# Altium PCB final.PcbDoc
Units mm, origin at the board's own origin, x right, y up, seen from the top; angles counter-clockwise.
Board outline 152.4 x 101.6 mm, 2 copper layers (Top Layer, Bottom Layer); 5 components, 12 nets, 30 pads, 0 vias.
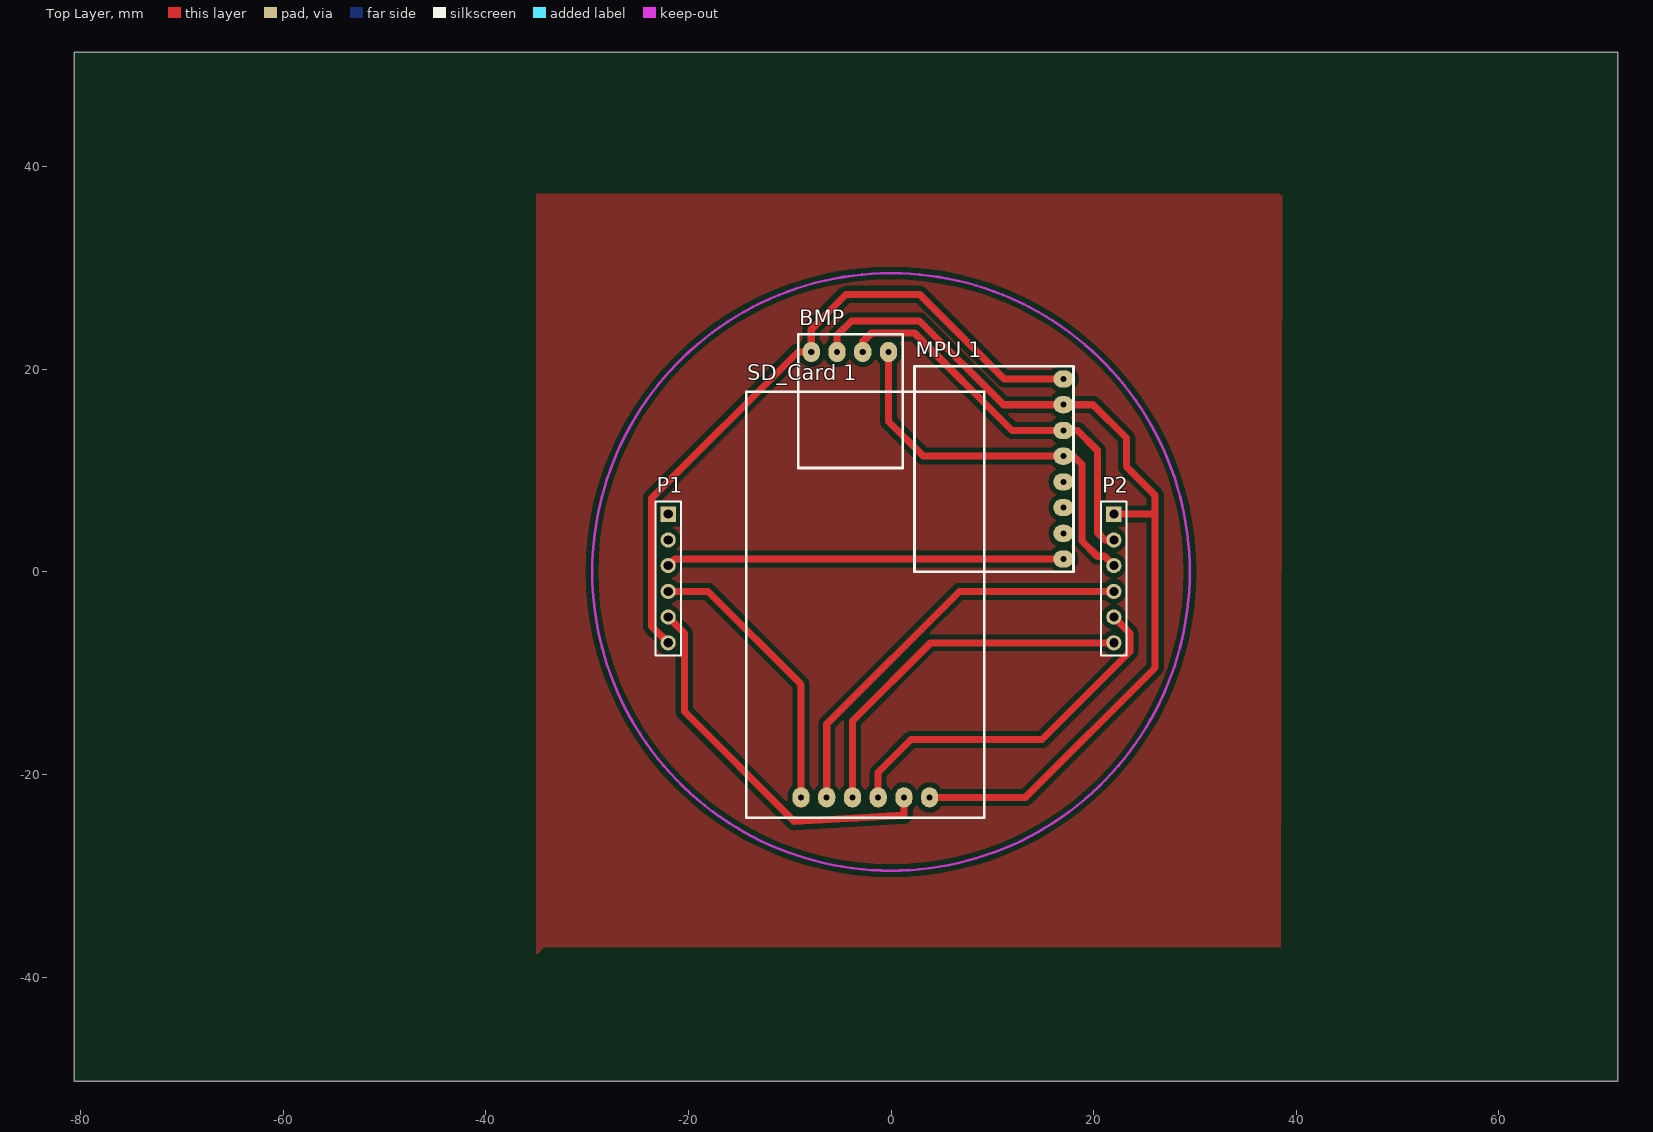
[diagram p0: Top Layer view]
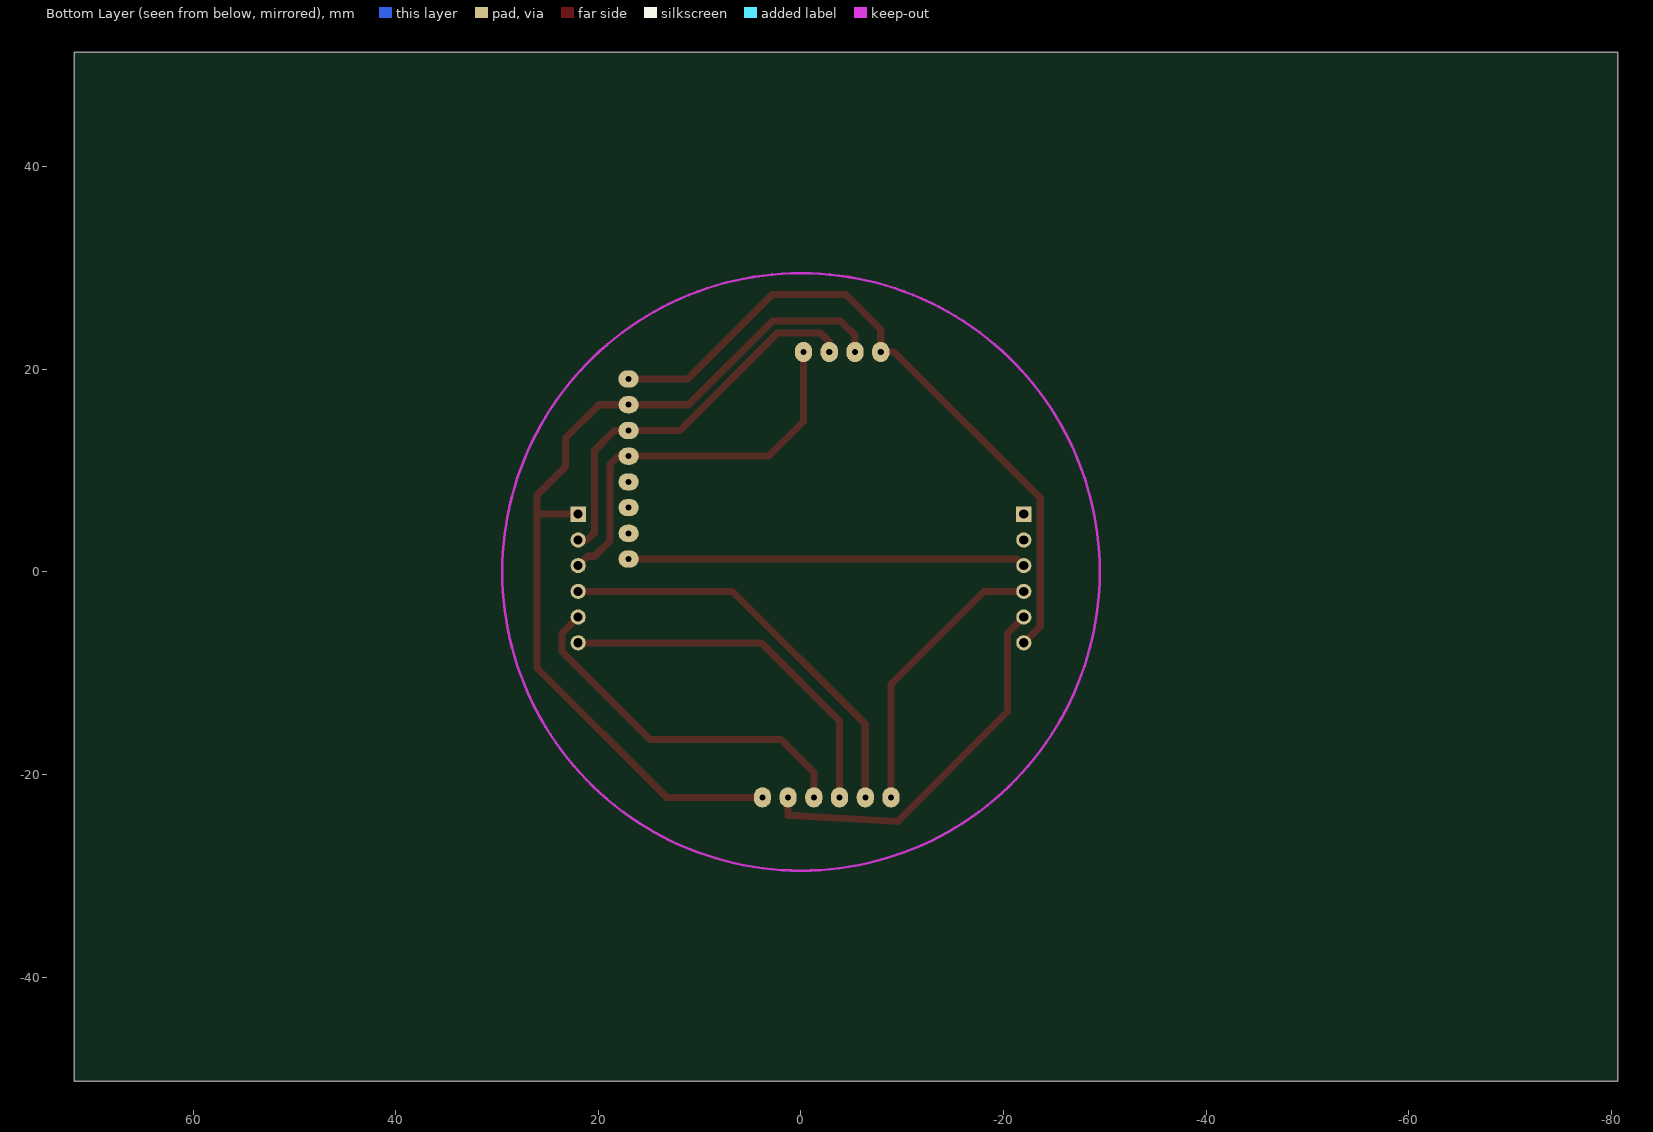
[diagram p1: Bottom Layer view, seen from below]

## Layer stack, top to bottom
Top Solder: solder mask 0.0102, Solder Resist, Dk 3.5
Top Layer: signal copper 0.0356
Dielectric 1: dielectric 0.32, FR-4, Dk 4.8
Bottom Layer: signal copper 0.0356
Bottom Solder: solder mask 0.0102, Solder Resist, Dk 3.5

## Board outline
-80.645,-50.292 71.755,-50.292 71.755,51.308 -80.645,51.308

## Design rules (kind name [scope] priority, off if disabled: settings)
Clearance [All] p1: gap=0.5 ignorepadtopadclearanceinfootprint=FALSE
PolygonConnect [All] p1: connectstyle=Relief reliefconductorwidth=0.254 reliefentries=4 polygonreliefangle="90 Angle" airgapwidth=0.254
RoutingLayers [All] p1: top layer_v5=TRUE bottom layer_v5=FALSE
RoutingVias [All] p1: holewidth=0.711 width=1.27 viastyle="Through Hole" minholewidth=0.711 minwidth=1.27 maxholewidth=0.711 maxwidth=1.27
SolderMaskExpansion [All] p1: expansion=0.102
Width [All] p1: maxlimit=1 minlimit=0.5 preferedwidth=0.7
29 further rules are at their usual default settings.

## Components (designator, comment, footprint, x,y, rotation, side; value= is the part's Value field where it differs from the comment)
BMP "BMP" BMP -4.064,16.859 r180 top
"MPU 1" "MPU" MPU 2.318,20.32 r90 top
P1 "Header 6" HDR1X6 -22,5.7 r270 top
P2 "Header 6" HDR1X6 22,5.7 r270 top
"SD_Card 1" "SD_Card" SD_Card -2.54,-24.257 r0 top

## Footprints (in the part's own frame and the unit in brackets; to place one, negate y for a bottom-side part, rotate by r counter-clockwise, add the part's x,y. Pads: shape width x height; smd on the part's side, far side on the other; paste and mask are expansions set on the pad)
BMP [mm]
  oval 1.7x2 hole 0.6: 28(-3.81,-4.858) 29(-1.27,-4.858) 30(1.27,-4.858) 31(3.81,-4.858)
  silkscreen extent -5.21,-6.6 5.09,6.6
HDR1X6 [mm] "Connector; Header; 6 Position"
  rect 1.5x1.5 hole 0.9: 1(0,0)
  round 1.5 hole 0.9: 2(2.54,0) 3(5.08,0) 4(7.62,0) 5(10.16,0) 6(12.7,0)
  silkscreen extent -1.27,-1.27 13.97,1.27
MPU [mm]
  oval 1.7x2 hole 0.6: 1(-19.05,-14.7) 2(-16.51,-14.7) 3(-13.97,-14.7) 4(-11.43,-14.7) 5(-8.89,-14.7) 6(-6.35,-14.7) 7(-3.81,-14.7) 8(-1.27,-14.71)
  silkscreen extent -20.3,-15.7 0,0
SD_Card [mm]
  oval 1.7x2 hole 0.6: 37(6.35,2) 38(3.81,2) 39(1.27,2) 40(-1.27,2) 41(-3.81,2) 42(-6.35,2)
  silkscreen extent -11.75,0 11.75,42.04

## Part data
P1 P2: "Header, 6-Pin", LatestRevisionDate=17-Jul-2002, LatestRevisionNote="Re-released for DXP Platform.", Publisher="Altium Limited"

## Nets (pads, with @x,y where several pads share a name; then routed paths per layer and width w, separated by ;. In a path a pad name is that pad's centre, name@x,y a point inside that pad or via, vN(x,y) a via of type N, cw(c..) or ccw(c..) an arc to the next point about the centre after c; other vN are vias at no path point)
"3.3 volt": "MPU 1.8" BMP.31 P1.6 | length 68.7
  Top Layer w0.7: P1.6 -23.622,-5.378 -23.622,7.29 -9.195,21.717 BMP.31 -7.874,23.952 -4.445,27.381 2.845,27.381 11.176,19.05 17.028,19.05
"5 volt": "SD_Card 1.38" P1.5 | length 38
  Top Layer w0.7: P1.5 -20.396,-6.064 -20.396,-13.792 -9.525,-24.663 1.27,-24.028 1.27,-22.257
CS: "SD_Card 1.42" P1.4 | length 28.1
  Top Layer w0.7: P1.4 -18.07,-1.92 -8.89,-11.1 -8.89,-22.257
GND: "MPU 1.7" "SD_Card 1.37" BMP.30 P2.1 | length 91.1
  Top Layer w0.7: BMP.30 -5.334,23.368 -3.912,24.79 2.819,24.79 11.1,16.51 17.018,16.51 19.939,16.51 23.241,13.208 23.241,10.389 26.06,7.569 26.06,5.715 ; 3.81,-22.257 13.278,-22.257 26.06,-9.474 26.06,5.715 ; P2.1 21.985,5.715 26.06,5.715
INT: "MPU 1.1" P1.3 | length 39.3
  Top Layer w0.7: P1.3 -21.35,1.27 17.018,1.27
MISO: "SD_Card 1.39" P2.5 | length 36.3
  Top Layer w0.7: -1.27,-22.257 -1.27,-19.812 1.981,-16.561 14.91,-16.561 23.6,-7.871 23.6,-6.06 P2.5
MOSI: "SD_Card 1.40" P2.6 | length 36.5
  Top Layer w0.7: -3.81,-22.257 -3.81,-14.732 3.922,-7 P2.6
RX: P1.1
SCK: "SD_Card 1.41" P2.4 | length 41
  Top Layer w0.7: -6.35,-22.257 -6.35,-15.017 6.747,-1.92 P2.4
SCL: "MPU 1.6" BMP.29 P2.2 | length 39.4
  Top Layer w0.7: BMP.29 -2.794,22.733 -1.956,23.571 2.337,23.571 11.938,13.97 17.018,13.97 18.415,13.97 20.371,12.014 20.371,3.912 21.122,3.16 P2.2
SDA: "MPU 1.5" BMP.28 P2.3 | length 39.4
  Top Layer w0.7: BMP.28 -0.254,14.859 3.175,11.43 17.018,11.43 18.034,11.43 18.872,10.592 18.872,3.048 20.371,1.549 21.071,1.549 P2.3
TX: P1.2
pads on no net: "MPU 1.2" "MPU 1.3" "MPU 1.4"

## Polygon pours and split planes (outlines as drawn)
no net on Top Layer (solid, pour order 34): 38.608,37.084 38.354,37.338 -35.052,37.338 -35.052,-37.846 -34.29,-37.084 38.481,-37.084
no net on Top Layer "Top Layer-No Net 1" (solid, pour order 32): 37.846,-36.83
no net on Top Layer "Top Layer-No Net" (solid, pour order 14): 11.176,-82.677

## Keep-outs
Keep-Out Layer:
  circle w0.254: c0,0 r29.5